# Altium PCB pcb.PCBDOC
Units mil, origin at the board's own origin, x right, y up, seen from the top; angles counter-clockwise.
Board outline 3500 x 1800 mil, 6 copper layers (Top Layer, Internal Plane 1, MidLayer1, MidLayer2, Internal Plane 2, Bottom Layer); 21 components, 13 nets, 74 pads, 25 vias.
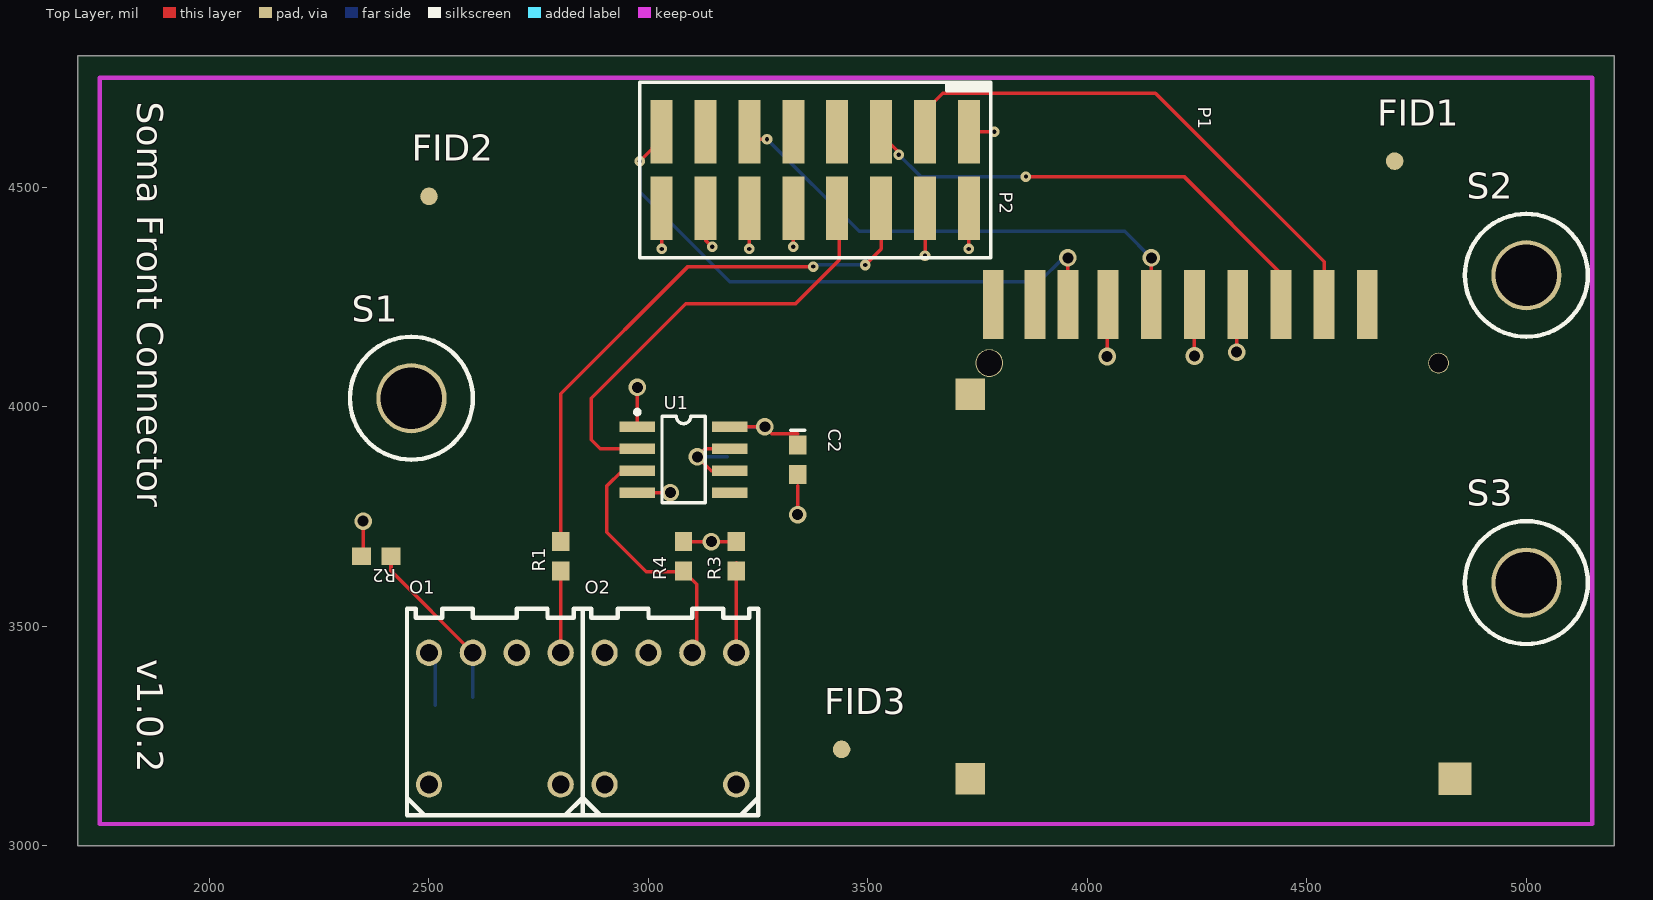
[diagram p0: Top Layer view]
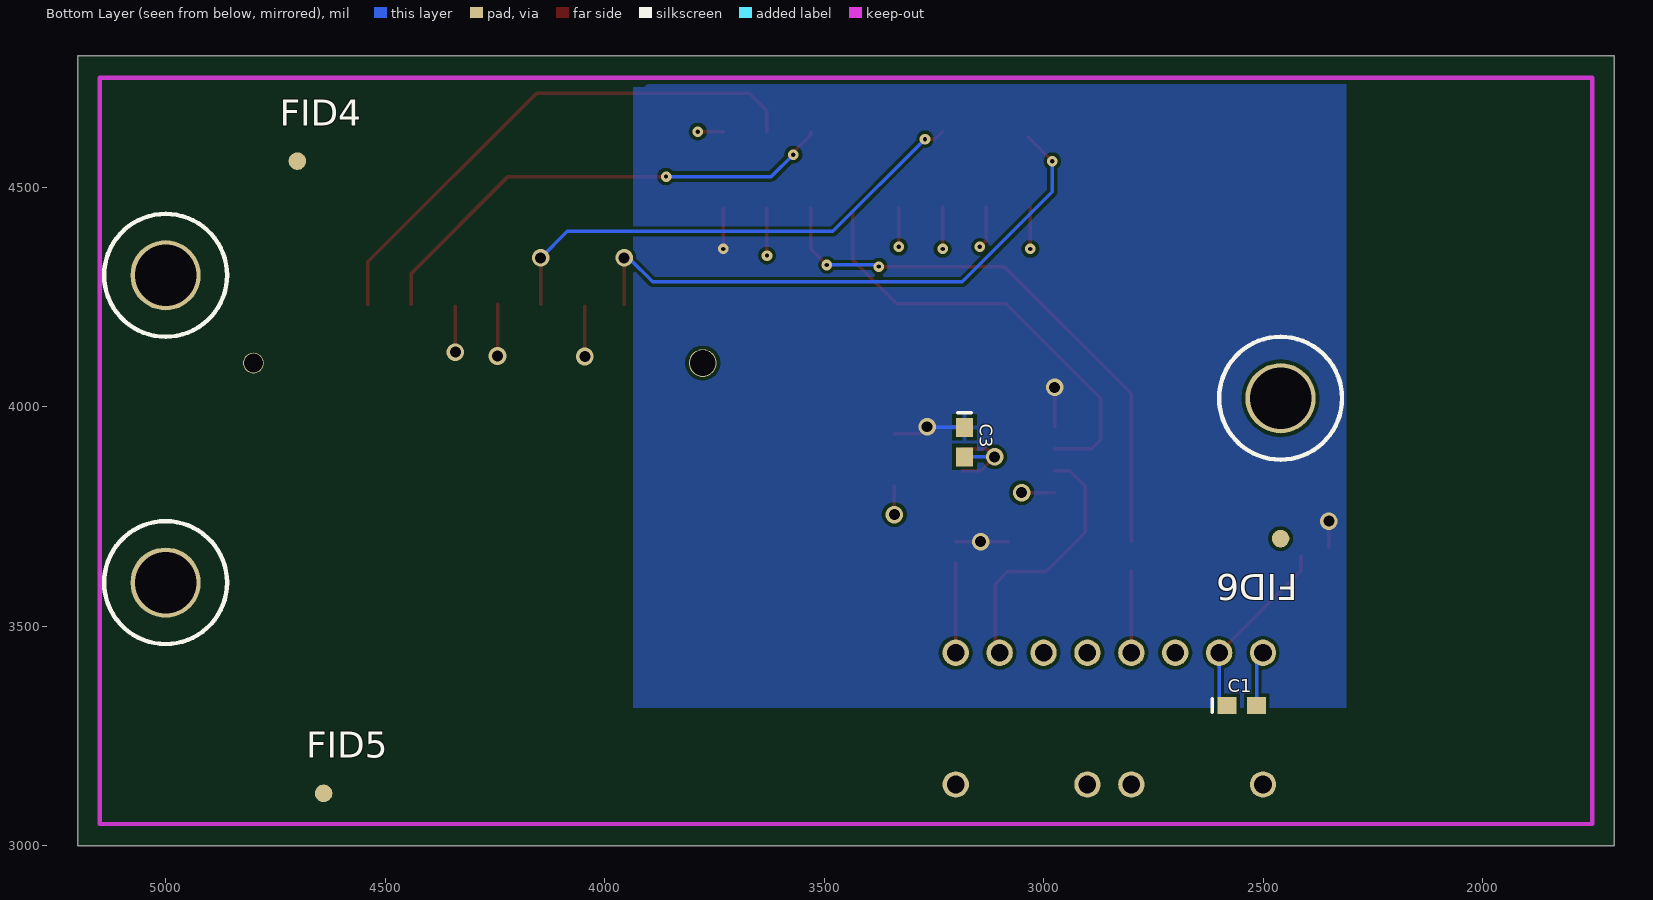
[diagram p1: Bottom Layer view, seen from below]
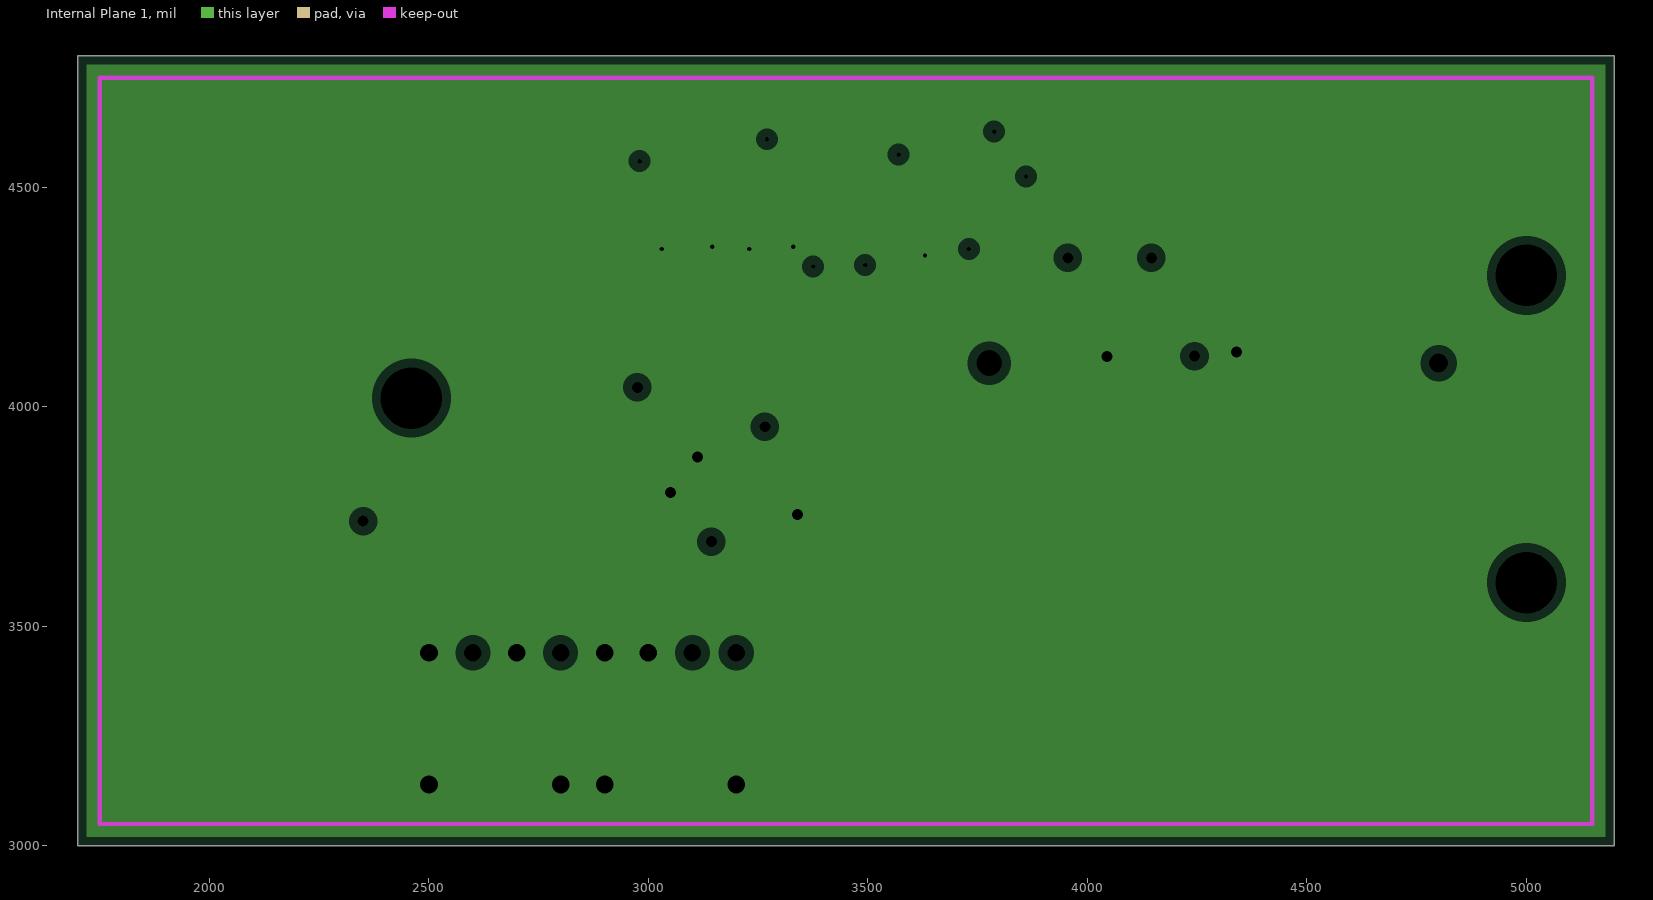
[diagram p2: Internal Plane 1, clearances drawn from the general rule]
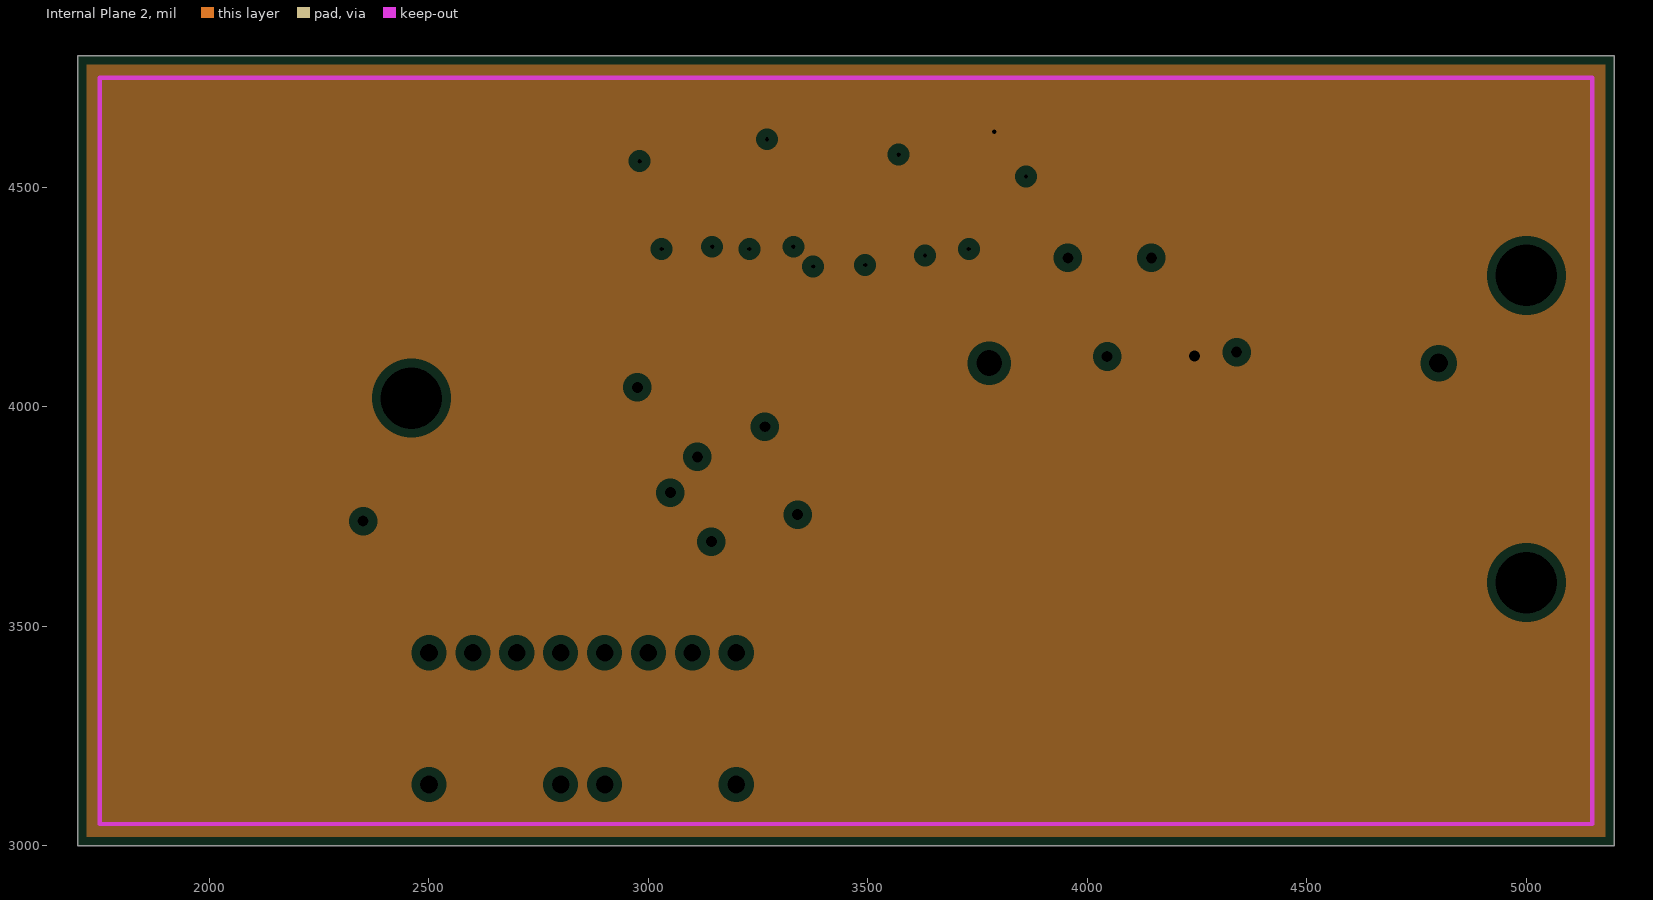
[diagram p3: Internal Plane 2, clearances drawn from the general rule]

## Layer stack, top to bottom
Top Layer: signal copper 1.4
Dielectric: core 12.6, FR-4, Dk 4.8
Internal Plane 1: plane copper 1.4, net GND
Dielectric: prepreg 12.6, FR-4, Dk 4.8
MidLayer1: signal copper 1.4
Dielectric: core 12.6, FR-4, Dk 4.8
MidLayer2: signal copper 1.4
Dielectric: prepreg 12.6, FR-4, Dk 4.8
Internal Plane 2: plane copper 1.4, net VCC
Dielectric: core 12.6, FR-4, Dk 4.8
Bottom Layer: signal copper 1.4

## Board outline
1700,3000 5200,3000 5200,4800 1700,4800

## Design rules (kind name [scope] priority, off if disabled: settings)
Clearance [All] p1: gap=8
ComponentClearance [All] p1: gap=10 collisioncheckmode=3 verticalgap=10
HoleSize [All] p1: absolutevalues=TRUE maxlimit=180 minlimit=1 maxpercent=80.000 minpercent=20.000
PlaneClearance [All] p1: clearance=20
PlaneConnect [All] p1: planeconnectstyle=Relief reliefexpansion=20 reliefentries=4 reliefconductorwidth=10 reliefairgap=10
PolygonConnect [All] p1: connectstyle=Relief reliefconductorwidth=10 reliefentries=4 polygonreliefangle="90 Angle"
RoutingLayers [All] p1: top layer_v5=TRUE mid layer 1_v5=FALSE mid layer 2_v5=FALSE bottom layer_v5=TRUE
RoutingVias [All] p1: holewidth=200 width=10 viastyle="Through Hole" minholewidth=14 minwidth=10 maxholewidth=200 maxwidth=50
SolderMaskExpansion [All] p1: expansion=4
TestPointUsage [All] p1: valid=0 allowmultiple=FALSE
Testpoint [All] p1: side=15 testpointundercomponent=TRUE minsize=40 maxsize=100 preferedsize=60 minholesize=0 maxholesize=40 preferedholesize=32 testpointgrid=1 style=1023 order=0123456789
Width [All] p1: maxlimit=300 minlimit=8 preferedwidth=8 midlayer1_maxwidth=8 midlayer2_maxwidth=8 minimp=50.000000 maximp=50.000000 favimp=50.000000
13 further rules are at their usual default settings.

## Components (designator, comment, footprint, x,y, rotation, side; value= is the part's Value field where it differs from the comment)
C1 "Cap" CC1608-0603 2548.25,3320 r180 bottom
C2 "CAPACITOR" 0603 3340,3880 r270 top
C3 "Cap" CC1608-0603 3180,3920 r270 bottom
FID1 "FIDUCIAL" FIDUCIAL 4700,4560 r90 top
FID2 "FIDUCIAL" FIDUCIAL 2500,4480 r90 top
FID3 "FIDUCIAL" FIDUCIAL 3440,3220 r90 top
FID4 "FIDUCIAL" FIDUCIAL 4700,4560 r90 bottom
FID5 "FIDUCIAL" FIDUCIAL 4640,3120 r90 bottom
FID6 "FIDUCIAL" FIDUCIAL 2460,3700 r270 bottom
O1 "HFBR-2528 Fiber Receiver" HPVL 2650,3440 r0 top
O2 "HFBR-1528 Fiber Transmitter" HPVL 3050,3440 r0 top
P1 "Header 8X2" "MOLEX 15-91-2160" 3380,4540 r0 top
P2 "Header 7" SCDA1A1501 4800,4100 r0 top
R1 "Res1" CR1608-0603 2800,3660 r270 top
R2 "Res1" CR1608-0603 2380,3660 r0 top
R3 "Res1" CR1608-0603 3200,3660 r90 top
R4 "Res1" CR1608-0603 3080,3660 r90 top
S1 "Mounting Screw" SCREW6-32 2460,4020 r0 top
S2 "Mounting Screw" SCREW6-32 5000,4300 r0 top
S3 "Mounting Screw" SCREW6-32 5000,3600 r0 top
U1 "SN75451BD" SO-G8/E2.5 3080,3880 r270 top

## Footprints (in the part's own frame and the unit in brackets; to place one, negate y for a bottom-side part, rotate by r counter-clockwise, add the part's x,y. Pads: shape width x height; smd on the part's side, far side on the other; paste and mask are expansions set on the pad)
0603 [mm] "Standard-sized 0603 Passive"
  rect 1.1x1 smd: 1(-0.85,0) 2(0.85,0)
  silkscreen extent -1.7,-0.4 -1.7,0.4
CC1608-0603 [mm] "Chip Capacitor; Body 1.6 x 0.8 mm (LxW typ)"
  rect 1.1x1 smd: 1(-0.85,0) 2(0.85,0)
  silkscreen extent -1.7,-0.4 -1.7,0.4
CR1608-0603 [mm] "Chip Resistor; Body 1.6 x 0.8 mm (LxW typ)"
  rect 1.1x1 smd: 1(-0.85,0) 2(0.85,0)
FIDUCIAL [mil] "Fiducial footprint as recommended by PCBpro"
  round 40 smd paste-20 mask+30: 0(0,0)
HPVL [mil]
  round 60 hole 40: 1(150,0) 2(50,0) 3(-50,0) 4(-150,0) 5(-150,-300) 8(150,-300)
  silkscreen extent -200,-370 200,100
"MOLEX 15-91-2160" [mm] "SMT 100-mil pitch 16 -pin dual-row header"
  rect 1.27x3.68 smd: 1(8.89,2.22) 2(8.89,-2.22) 3(6.35,2.22) 4(6.35,-2.22) 5(3.81,2.22) 6(3.81,-2.22) 7(1.27,2.22) 8(1.27,-2.22) 9(-1.27,2.22) 10(-1.27,-2.22) 11(-3.81,2.22) 12(-3.81,-2.22) 13(-6.35,2.22) 14(-6.35,-2.22) 15(-8.89,2.22) 16(-8.89,-2.22)
  silkscreen extent -10.16,-5.08 10.16,5.08
SCDA1A1501 [mm] "ALPS SD Card recepticle"
  round 1.6 hole 1.5: 0(-26,0)
  round 1.2 hole 1.1: 0(0,0)
  rect 1.2x4 smd: 1(-6.625,3.4) 2(-9.125,3.4) 3(-11.625,3.4) 4(-14.125,3.4) 5(-16.625,3.4) 6(-19.125,3.4) 7(-21.45,3.4) 8(-23.35,3.4) 9(-4.125,3.4) 10(-25.775,3.4)
  rect 1.7x1.8 smd: 11(-27.1,-24.05) 13(-27.1,-1.8)
  rect 1.9x1.9 smd: 13(0.95,-24.05)
SCREW6-32 [mil] "6-32 screw"
  round 160 hole 140 paste-20 mask+30: 0(0,0)
  silkscreen extent -140,-140 140,140
SO-G8/E2.5 [mm] "Small Outline, Plastic; 8 Leads; Body Width 3.9 mm"
  rect 0.6x2.05 smd: 1(-1.905,-2.675) 2(-0.635,-2.675) 3(0.635,-2.675) 4(1.905,-2.675) 5(1.905,2.675) 6(0.635,2.675) 7(-0.635,2.675) 8(-1.905,2.675)
  silkscreen extent -2.88,-2.8 2.5,1.25

## Part data
C1 C3: "Capacitor"
C2: library part Cap2, "Capacitor"
FID1 FID2 FID3 FID4 FID5 FID6: "Fiducial"
O1: library part HFBR-2528, "Low-cost fiber receiver"
O2: library part HFBR-1528, "Low-cost fiber transmitter"
P1: "Header, 8-Pin, Dual row"
P2: "Header, 7-Pin"
R1 R2 R3 R4: "Resistor"
S1 S2 S3: library part MNTSCREW
U1: "Dual Peripheral Driver"

## Via types
v1: diameter 24, hole 10, Top Layer to Bottom Layer, 13 vias
v2: diameter 40, hole 25, Top Layer to Bottom Layer, 12 vias

## Nets (pads, with @x,y where several pads share a name; then routed paths per layer and width w, separated by ;. In a path a pad name is that pad's centre, name@x,y a point inside that pad or via, vN(x,y) a via of type N, cw(c..) or ccw(c..) an arc to the next point about the centre after c; other vN are vias at no path point)
+5VCC: C2.1 C3.1 P1.2 R2.1 R3.2 R4.2 U1.1 U1.8 | length 588.6
  Top Layer w8: 2350,3680 v2@2350,3721.54 ; U1.1 v2(2974.68,4044.68) ; R4.2 R3.2 ; U1.8 v2(3265,3955) 3280.94,3939.06 3340,3939.06 ; v1(3730,4360) P1.2
  Bottom Layer w8: C3.1 v2@3263.46,3953.46
  other v2: 3143.46,3693.46 2350,3740
FIBERIN: P1.6 R1.1 | length 1295.8
  Top Layer w8: R1.1 2800,4030 3090,4320 v1(3375,4320) ; v1(3493.49,4323.49) 3530,4360 P1.6
  Bottom Layer w8: v1(3375,4320) 3378.49,4323.49 v1(3493.49,4323.49)
GND: C1.2 C2.2 C3.2 O1.2 O1.4 O1.5 O1.8 O2.3 O2.4 O2.5 O2.8 P1.4 P1.10 P1.12 P1.14 P1.16 P2.3 P2.6 U1.4 U1.6 U1.7 | length 1184.6
  Top Layer w8: U1.4 v2(3050,3805) ; v1(3030,4360) P1.16@3030,4455 ; P1.14@3130,4455 3130,4380 v1(3145,4365) ; U1.6 3143.07,3855 v2(3111.54,3886.54) 3130,3905 U1.7 ; v1(3230,4360) P1.12@3230,4455 ; v1(3330,4365) P1.10 ; v2(3340,3755) 3340,3820.94 ; v1(3630,4345) P1.4 ; v2(4045,4115) P2.6@4045,4230 ; v2(4340,4125) P2.3@4340,4230
  Bottom Layer w8: C1.2 O1.4@2514.79,3425.21 ; v2(3111.54,3886.54) C3.2
MMCCS: P1.3 P2.1 | length 1229.4
  Top Layer w8: P1.3 3630,4675 3670,4715 4155,4715 4539.17,4330.83 P2.1
MMCDI: P1.5 P2.2 | length 1122.3
  Top Layer w8: P1.5 3530,4620 3570,4580 v1(3570,4575) ; v1(3860,4525) 4220,4525 4440.75,4304.25 P2.2
  Bottom Layer w8: v1(3570,4575) 3620,4525 v1(3860,4525)
MMCDO: P1.15 P2.7 | length 1336.4
  Top Layer w8: v1(2980,4560) P1.15@3035,4615 ; P2.7 v2(3955.51,4339.49)
  Bottom Layer w8: v1(2980,4560) 2980,4490 3185,4285 3890.51,4285 3945,4339.49 v2(3955.51,4339.49)
MMCSCLK: P1.11 P2.5 | length 1140.4
  Top Layer w8: P1.11 3247.4,4610 v1(3270,4610) ; P2.5 v2(4145.47,4339.53)
  Bottom Layer w8: v1(3270,4610) 3480,4400 4085,4400 v2(4145.47,4339.53)
NetC1_1: C1.1 O1.3 R2.2 | length 399
  Top Layer w8: R2.2 2413.46,3626.54 O1.3
  Bottom Layer w8: C1.1@2600,3338.28 O1.3
NetO1_1: O1.1 R1.2 | length 186.5
  Top Layer w8: O1.1 R1.2
NetO2_1: O2.1 R3.1 | length 205
  Top Layer w8: O2.1 R3.1@3200,3645
NetO2_2: O2.2 R4.1 U1.3 | length 605.4
  Top Layer w8: U1.3 2940,3855 2905,3820 2905,3715 2995,3625 R4.1@3080,3625 ; R4.1 3110,3596.54 O2.2@3110,3435
NetP1_8: P1.8 U1.2 | length 1013.4
  Top Layer w8: U1.2 2890,3905 2870,3925 2870,4020 3085,4235 3335,4235 3435,4335 P1.8@3435,4445
VCC: P1.1 P2.4 | length 175.4
  Top Layer w8: P1.1 v1(3787.6,4627.4) ; v2(4243.9,4116.1) P2.4
pads on no net: FID1.0 FID2.0 FID3.0 FID4.0 FID5.0 FID6.0 P1.7 P1.9 P1.13 P2.0 P2.8 P2.9 P2.10 P2.11 P2.13 S1.0 S2.0 S3.0 U1.5

## Polygon pours and split planes (outlines as drawn)
+5VCC on Bottom Layer (solid): 3935,3315 2310,3315 2310,4735 3902.17,4735 3910.38,4728.49 3935,4728.49
GND on Internal Plane 1 (split plane): 1720.02,3020.01 5179.98,3020.01 5179.98,4779.98 1720.02,4779.98
VCC on Internal Plane 2 (split plane): 1720.02,3020.01 5179.98,3020.01 5179.98,4779.98 1720.02,4779.98

## Keep-outs
Keep-Out Layer:
  lines w10: 1750,3050 1750,4750 5150,4750 5150,3050 1750,3050

## Other copper
Top Layer:
  text "Layer 1" at 5430,3890 h60
Bottom Layer:
  text "Layer 4" at 5445,3490 h60
Internal Plane 1 (plane layer: these items are gaps in the copper):
  text "Layer 2" at 5440,3755 h60
Internal Plane 2 (plane layer: these items are gaps in the copper):
  text "Layer 3" at 5440,3625 h60

## Silkscreen, mask and mechanical layers (free items; w line width, h text height)
Top Overlay:
  text "Soma Front Connector" at 1835,4695 h60 r270
  text "v1.0.2" at 1835,3425 h60 r270
Mechanical 5:
  the board outline again, w1
Drill Drawing:
  text ".LEGEND" at 5400,3200 h60
  text "Drill Drawing." at 5400,3100 h60

## Dimensions
1750,3050 to 1750,4750 on Mechanical 1
1750,3050 to 5150,3050 on Mechanical 1